# Altium PCB Earphone-6.PcbDoc
Units mil, origin at the board's own origin, x right, y up, seen from the top; angles counter-clockwise.
Board outline 966.28 x 1869.04 mil, 2 copper layers (Top Layer, Bottom Layer); 84 components, 41 nets, 259 pads, 67 vias.
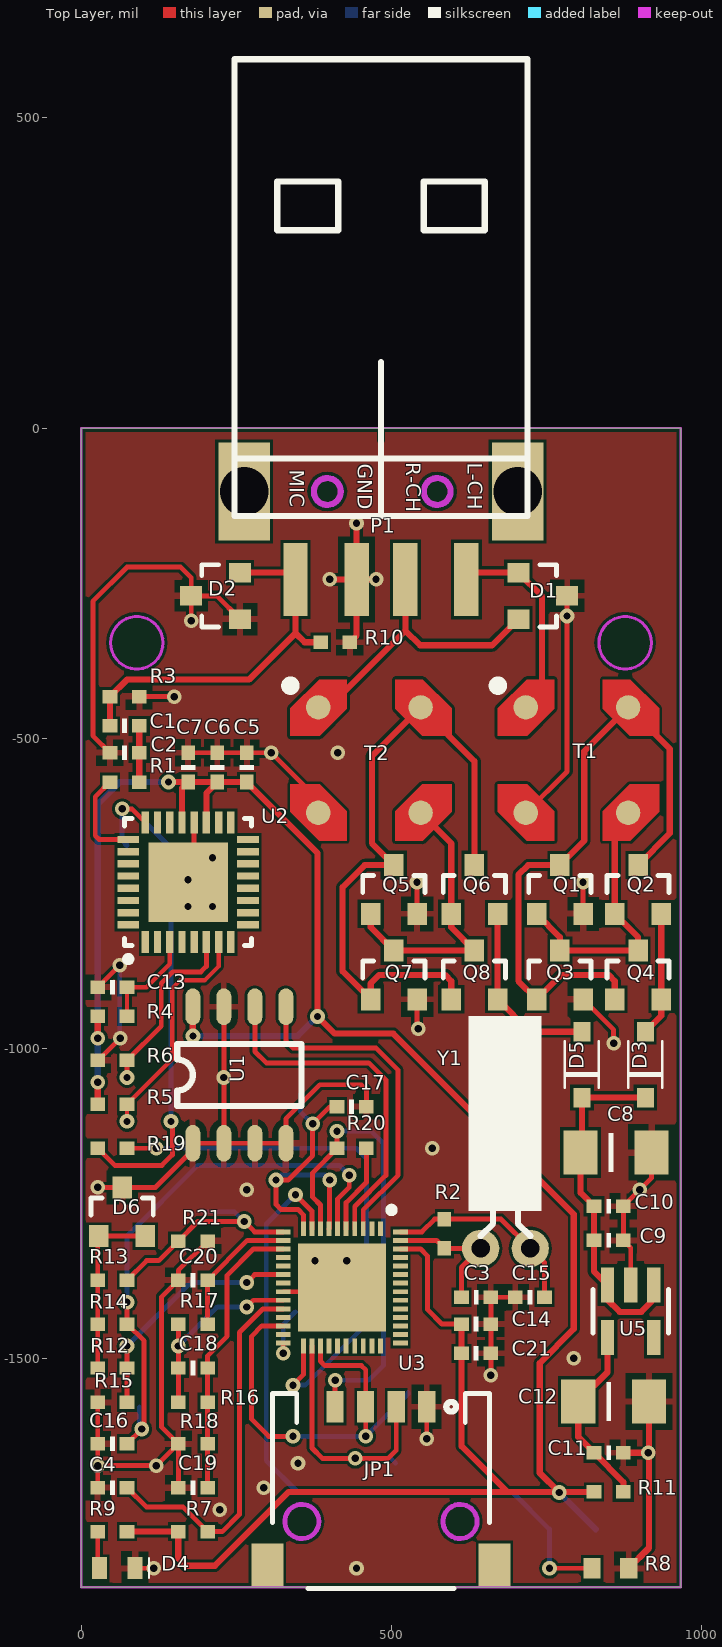
[diagram p0: Top Layer view]
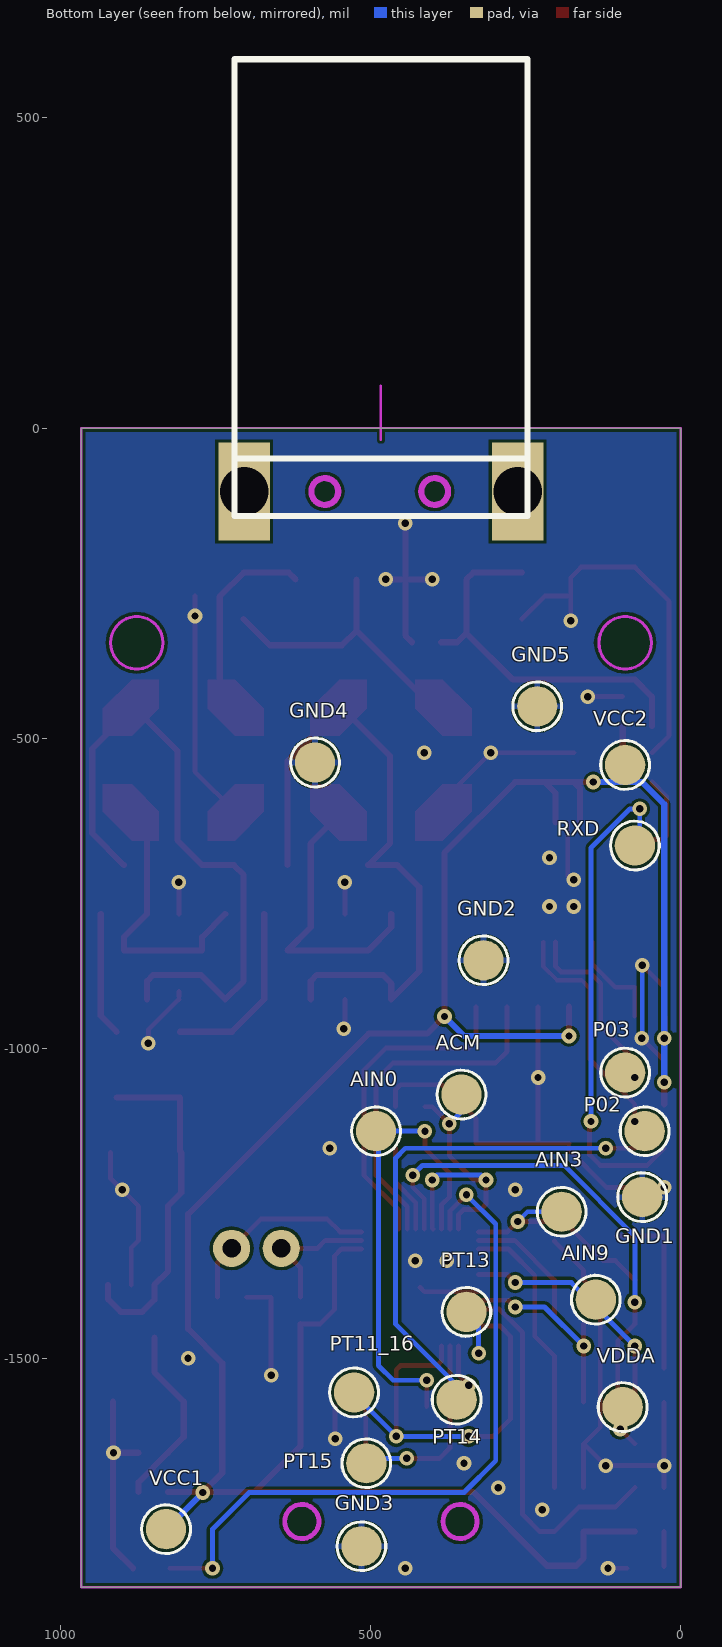
[diagram p1: Bottom Layer view, seen from below]
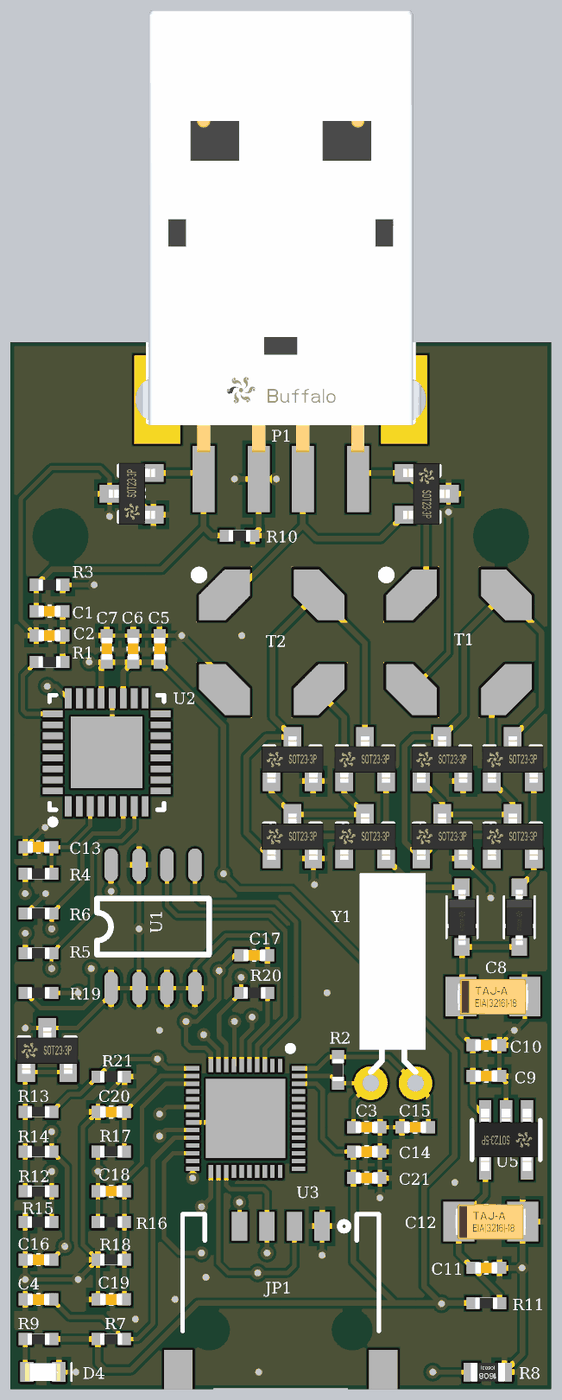
[diagram p2: 3D render of the assembled board from above, using the file's embedded part models]

## Layer stack, top to bottom
Top Solder: solder mask 0.4, Solder Resist, Dk 3.5
Top Layer: signal copper 1.4
Dielectric1: dielectric 12.6, FR-4, Dk 4.8
Bottom Layer: signal copper 1.4
Bottom Solder: solder mask 0.4, Solder Resist, Dk 3.5

## Board outline
0,-1869.04 0,0 966.28,0 966.28,-1869.04

## Design rules (kind name [scope] priority, off if disabled: settings)
Clearance [All] p1: gap=5
FabricationTestPointUsage TestPointUsage [All] p1: valid=0 allowmultiple=FALSE
FabricationTestpoint Testpoint [All] p1: side=3 testpointundercomponent=TRUE minsize=40 maxsize=100 preferedsize=60 minholesize=0 maxholesize=40 preferedholesize=32 testpointgrid=1 allowsidetop=TRUE allowsidebottom=TRUE usegrid=TRUE gridtolerance=0.01
HoleSize [All] p1: absolutevalues=TRUE maxlimit=100 minlimit=3.94 maxpercent=80.000 minpercent=20.000
HoleToHoleClearance [All] p1: gap=7.87 allowstackedmicrovias=TRUE
MinimumSolderMaskSliver [All] p1: minsoldermaskwidth=0
PolygonConnect PolygonConnect_1 [IsVia] p1: connectstyle=Direct reliefconductorwidth=10 reliefentries=4 polygonreliefangle="90 Angle" airgapwidth=10
PolygonConnect [All] p2: connectstyle=Relief reliefconductorwidth=10 reliefentries=4 polygonreliefangle="90 Angle" airgapwidth=10
RoutingVias [All] p1: holewidth=28 width=50 viastyle="Through Hole" minholewidth=3.94 minwidth=3.94 maxholewidth=28 maxwidth=50
SilkToSilkClearance [All] p1: silktosilkclearance=3.94
SilkToSolderMaskClearance SilkscreenOverComponentPads [IsPad] p1: minsilkscreentomaskgap=3.94 clearancetoexposedcopper=TRUE
SolderMaskExpansion [All] p1: expansion=4
Width [All] p1: maxlimit=10 minlimit=3.94 preferedwidth=10 minimp=50.000000 maximp=50.000000 favimp=50.000000
23 further rules are at their usual default settings.

## Components (designator, comment, footprint, x,y, rotation, side; value= is the part's Value field where it differs from the comment)
ACM "TP9" SIP1 353.22,-1074.8 r180 bottom
AIN0 "TP8" SIP1 491.01,-1133.86 r180 bottom
AIN3 "TP11" SIP1 191.8,-1263.78 r90 bottom
AIN9 "TP12" SIP1 136.68,-1405.51 r90 bottom
C1 "2.2uF" 0402C 69.76,-480.32 r0 top
C2 "47pF" 0402C 69.76,-523.62 r0 top
C3 "20pF" 0402C 636.68,-1401.57 r180 top
C4 "0.1uF" 0402C 50.07,-1708.66 r0 top
C5 "0.01uF" 0402C 266.6,-547.24 r270 top
C6 "0.01uF" 0402C 219.36,-547.24 r270 top
C7 "0.01uF" 0402C 172.11,-547.24 r270 top
C8 "CP6032-100uF" T3216-18[A] 862.21,-1168.25 r0 top
C9 "1uF" 0402C 850.39,-1309.98 r180 top
C10 "10uF" 0402C 850.39,-1254.87 r180 top
C11 "10uF" 0402C 850.39,-1652.5 r180 top
C12 "CP6032-100uF" T3216-18[A] 858.27,-1569.83 r0 top
C13 "1uF" 0402C 50.07,-901.57 r0 top
C14 "10uF" 0402C 636.68,-1444.88 r0 top
C15 "20pF" 0402C 723.3,-1401.57 r0 top
C16 "1uF" 0402C 50.07,-1637.8 r180 top
C17 "0.1uF" 0402C 435.89,-1094.49 r180 top
C18 "30pF" 0402C 179.99,-1515.75 r0 top
C19 "3.9nF" 0402C 179.99,-1708.66 r0 top
C20 "27nF" 0402C 179.99,-1374.02 r180 top
C21 "0.1uF" 0402C 636.68,-1492.13 r180 top
D1 "PESD5V2S2UT" SOT23 744.1,-270.61 r270 top
D2 "PESD5V2S2UT" SOT23 216.54,-270.61 r90 top
D3 "PMEG4002EJ" SOD323 909.45,-1026.52 r90 top
D4 "LED" 0603L 57.94,-1838.58 r0 top
D5 "PMEG4002EJ" SOD323 807.09,-1026.52 r90 top
D6 "AZ432" SOT23 65.82,-1263.78 r0 top
GND1 "TP3" SIP1 61.88,-1240.16 r180 bottom
GND2 "TP4" SIP1 317.78,-858.27 r180 bottom
GND3 "TP15" SIP1 514.63,-1803.15 r90 bottom
GND4 "TP16" SIP1 589.44,-539.37 r90 bottom
GND5 "TP17" SIP1 231.17,-448.82 r90 bottom
JP1 "TEST_PAPER" TEST_PAPER 483.14,-1706.17 r0 top
P1 "EarPhone" USB-A 483.14,-173.23 r270 top
P02 "TP18" SIP1 57.94,-1133.86 r180 bottom
P03 "TP19" SIP1 89.44,-1039.37 r180 bottom
PT11_16 "TP6" SIP1 526.45,-1555.12 r180 bottom
PT13 "TP13" SIP1 345.34,-1425.2 r90 bottom
PT14 "TP14" SIP1 361.09,-1566.93 r90 bottom
PT15 "TP7" SIP1 506.76,-1669.29 r180 bottom
Q1 "N-MOSFET" SOT23 771.65,-744.09 r0 top
Q2 "P-MOSFET" SOT23 897.64,-744.09 r0 top
Q3 "N-MOSFET" SOT23 771.65,-881.89 r0 top
Q4 "P-MOSFET" SOT23 897.64,-881.89 r0 top
Q5 "N-MOSFET" SOT23 503.94,-744.09 r0 top
Q6 "P-MOSFET" SOT23 633.86,-744.09 r0 top
Q7 "N-MOSFET" SOT23 503.94,-881.89 r0 top
Q8 "P-MOSFET" SOT23 633.86,-881.89 r0 top
R1 "1K" 0402R 69.75,-570.87 r0 top
R2 "10M" 0402R 585.5,-1299.21 r270 top
R3 "1K" 0402R 69.76,-433.07 r0 top
R4 "10K" 0402R 50.07,-948.82 r180 top
R5 "10K" 0402R 50.07,-1090.55 r0 top
R6 "10K" 0402R 50.07,-1019.68 r180 top
R7 "100K" 0402R 179.99,-1779.53 r180 top
R8 "NTC" 0603R 853.22,-1838.58 r180 top
R9 "10K" 0402R 50.07,-1779.53 r180 top
R10 "2.2K" 0402R 409.45,-345.42 r0 top
R11 "0R" 0402R 850.39,-1715.5 r180 top
R12 "560K/1%" 0402R 50.07,-1515.75 r180 top
R13 "210K/1%" 0402R 50.07,-1374.02 r180 top
R14 "2.2K" 0402R 50.07,-1444.88 r180 top
R15 "180K/1%" 0402R 50.07,-1570.87 r180 top
R16 "20K/100ppm" 0402R 179.99,-1570.87 r0 top
R17 "1K" 0402R 179.99,-1444.88 r180 top
R18 "560K" 0402R 179.99,-1637.8 r180 top
R19 "1K" 0402R 50.07,-1161.42 r0 top
R20 "200R" 0402R 435.89,-1161.42 r0 top
R21 "100K/1%" 0402R 179.99,-1311.02 r180 top
RXD "TP5" SIP1 73.69,-673.23 r180 bottom
T1 "LPR6235" "TRANS EMI" 799.21,-535.43 r0 top
T2 "LPR6235" "Trans EMI" 464.57,-535.43 r0 top
U1 "24C08" SOP-8 254.79,-1043.31 r90 top
U2 "LPC822M101JHI33" QFN50P500X500X100-33N 172.11,-732.28 r90 top
U3 "GLU_QFN48" QFN_48PIN 420.15,-1385.83 r270 top
U5 "MIC5231" SOT23-5 885.83,-1424.16 r180 top
VCC1 "TP1" SIP1 829.6,-1775.59 r180 bottom
VCC2 "TP2" SIP1 89.44,-543.31 r180 bottom
VDDA "TP10" SIP1 93.37,-1578.74 r90 bottom
Y1 "32.768KHz" Y1 683.93,-1322.83 r180 top

## Footprints (in the part's own frame and the unit in brackets; to place one, negate y for a bottom-side part, rotate by r counter-clockwise, add the part's x,y. Pads: shape width x height; smd on the part's side, far side on the other; paste and mask are expansions set on the pad)
0402C [mm]
  rect 0.6x0.55 smd: 1(-0.6,0) 2(0.6,0)
  silkscreen extent -0.1,-0.3 0.1,0.3, body extent -0.5,-0.25 0.5,0.25, height 0.5
0402R [mm]
  rect 0.6x0.55 smd: 1(-0.6,0) 2(0.6,0)
  body extent -0.5,-0.25 0.5,0.25, height 0.35
0603L [mm]
  rect 0.6x0.9 smd: 1(-0.725,0) 2(0.725,0)
  silkscreen extent 1.3,-0.4 1.3,0.4, body extent -0.8,-0.41 0.8,0.39, height 0.6
0603R [mm]
  rect 0.7x0.85 smd: 1(-0.75,0) 2(0.75,0)
  body extent -0.77,-0.43 0.77,0.43, height 0.46
QFN50P500X500X100-33N [mm]
  rect 0.9x0.3 smd: 1(-2.45,1.75) 2(-2.45,1.25) 3(-2.45,0.75) 4(-2.45,0.25) 5(-2.45,-0.25) 6(-2.45,-0.75) 7(-2.45,-1.25) 8(-2.45,-1.75) 17(2.45,-1.75) 18(2.45,-1.25) 19(2.45,-0.75) 20(2.45,-0.25) 21(2.45,0.25) 22(2.45,0.75) 23(2.45,1.25) 24(2.45,1.75)
  rect 0.3x0.9 smd: 9(-1.75,-2.45) 10(-1.25,-2.45) 11(-0.75,-2.45) 12(-0.25,-2.45) 13(0.25,-2.45) 14(0.75,-2.45) 15(1.25,-2.45) 16(1.75,-2.45) 25(1.75,2.45) 26(1.25,2.45) 27(0.75,2.45) 28(0.25,2.45) 29(-0.25,2.45) 30(-0.75,2.45) 31(-1.25,2.45) 32(-1.75,2.45)
  rect 3.25x3.25 smd: 33(0,0)
  silkscreen extent -3.27,-2.6 2.6,2.6
QFN_48PIN [mm]
  rect 3.6x3.6 smd: 0(0,0)
  rect 0.6x0.2 smd: 1(-2.4,1.575) 2(-2.4,1.225) 3(-2.4,0.875) 4(-2.4,0.525) 5(-2.4,0.175) 6(-2.4,-0.175) 7(-2.4,-0.525) 8(-2.4,-0.875) 9(-2.4,-1.225) 10(-2.4,-1.575) 25(2.4,-1.575) 26(2.4,-1.225) 27(2.4,-0.875) 28(2.4,-0.525) 29(2.4,-0.175) 30(2.4,0.175) 31(2.4,0.525) 32(2.4,0.875) 33(2.4,1.225) 34(2.4,1.575)
  rect 0.2x0.6 smd: 11(-2.275,-2.4) 12(-1.925,-2.4) 13(-1.575,-2.4) 14(-1.225,-2.4) 15(-0.875,-2.4) 16(-0.525,-2.4) 17(-0.175,-2.4) 18(0.175,-2.4) 19(0.525,-2.4) 20(0.875,-2.4) 21(1.225,-2.4) 22(1.575,-2.4) 23(1.925,-2.4) 24(2.275,-2.4) 35(2.275,2.4) 36(1.925,2.4) 37(1.575,2.4) 38(1.225,2.4) 39(0.875,2.4) 40(0.525,2.4) 41(0.175,2.4) 42(-0.175,2.4) 43(-0.525,2.4) 44(-0.875,2.4) 45(-1.225,2.4) 46(-1.575,2.4) 47(-1.925,2.4) 48(-2.275,2.4)
  silkscreen extent -3.3,1.91 -3.05,2.16
SIP1 [mm]
  round 1.65 smd: 1(0,0)
  silkscreen extent -1,-1 1,1
SOD323 [mm]
  rect 0.8x0.7 smd: 1(-1.35,0) 2(1.35,0)
  silkscreen extent -0.95,-0.7 0.95,0.7, body extent -1.26,-0.63 1.24,0.63, height 1.1
SOP-8 [mil]
  oval 59.06x24 smd: 1(-110,75) 2(-110,25) 3(-110,-25) 4(-110,-75) 5(110,-75) 6(110,-25) 7(110,25) 8(110,75)
  silkscreen extent -50,-100 50,100
SOT23 [mm]
  rect 0.8x0.9 smd: 1(-0.95,-1) 2(0.95,-1) 3(0,1)
  silkscreen extent -1.28,-0.13 1.28,0.57, body extent -1.4,-1.07 1.4,1.03, height 0.9
SOT23-5 [mm]
  rect 0.55x1.45 smd: 1(-0.95,-1.075) 2(0,-1.075) 3(0.95,-1.075) 4(0.95,1.075) 5(-0.95,1.075)
  silkscreen extent -1.55,-0.9 1.55,0.9, body extent -1.45,-1.42 1.45,1.4, height 1.1
T3216-18[A] [mm]
  rect 1.4x1.8 smd: 1(-1.45,0) 2(1.45,0)
  silkscreen extent -0.3,-0.8 -0.1,0.8, body extent -1.6,-0.81 1.6,0.79, height 1.62
TEST_PAPER [mm]
  rect 1.3x1.8 smd: 0(-4.65,-3.25) 0(4.65,-3.25)
  rect 0.7x1.3 smd: 1(1.875,3.25) 2(0.625,3.25) 3(-0.625,3.25) 4(-1.875,3.25)
  Keep-Out Layer circle w0.2: c-3.24,-1.45 r0.7
  Keep-Out Layer circle w0.2: c3.24,-1.45 r0.7
  silkscreen extent -4.45,-4.2 4.45,3.8
"TRANS EMI" [mil]
  round 39.37 smd: 1(-82.5,85) 2(-82.5,-85) 3(82.5,-85) 4(82.5,85)
  Top Layer region: 41.87,82.68 85.18,39.37 132.42,39.37 132.42,83.66 86.16,129.92 41.87,129.92
  Top Layer region: 41.87,-129.92 41.87,-82.68 85.18,-39.37 132.42,-39.37 132.42,-83.66 86.16,-129.92
  Top Layer region: -127.42,-83.66 -81.16,-129.92 -36.87,-129.92 -36.87,-82.68 -80.18,-39.37 -127.42,-39.37
  Top Layer region: -127.42,39.37 -127.42,83.66 -81.16,129.92 -36.87,129.92 -36.87,82.68 -80.18,39.37
  silkscreen extent -132,115 -122,125
"Trans EMI" [mil]
  round 39.37 smd: 1(-82.5,85) 2(-82.5,-85) 3(82.5,-85) 4(82.5,85)
  Top Layer region: 41.87,82.68 85.18,39.37 132.42,39.37 132.42,83.66 86.16,129.92 41.87,129.92
  Top Layer region: 41.87,-129.92 41.87,-82.68 85.18,-39.37 132.42,-39.37 132.42,-83.66 86.16,-129.92
  Top Layer region: -127.42,-83.66 -81.16,-129.92 -36.87,-129.92 -36.87,-82.68 -80.18,-39.37 -127.42,-39.37
  Top Layer region: -127.42,39.37 -127.42,83.66 -81.16,129.92 -36.87,129.92 -36.87,82.68 -80.18,39.37
  silkscreen extent -132,115 -122,125
USB-A [mm]
  rect 3x1 smd: 1(1.8,3.5) 2(1.8,1) 3(1.8,-1) 4(1.8,-3.5)
  rect 4x2.1 hole 2: 5(-1.8,5.6) 6(-1.8,-5.6)
  Keep-Out Layer circle w0.254: c-1.8,-2.2 r0.55
  Keep-Out Layer circle w0.254: c-1.8,2.3 r0.55
  silkscreen extent -19.5,-6 -0.8,6, body extent -19.43,-6.35 0.59,6.35, height 3.1
Y1 [mil]
  round 60 hole 30: 1(-40,0) 2(40,0)
  silkscreen extent -58,-375 60,-20

## Part data
ACM AIN0 AIN3 AIN9 GND1 GND2 GND3 GND4 GND5 P02 P03 PT11_16 PT13 PT14 PT15 RXD VCC1 VCC2 VDDA: library part TEST_PAD
C1 C2 C3 C4 C5 C6 C7 C9 C10 C11 C13 C15 C17 C18 C19 C20 C21: library part CAP
C8 C12 C14 C16: library part "CAP POL2"
D1 D2: "SOT23"
D3 D5: "SOD323F"
Q1 Q3 Q5 Q7: "4N80 N-Channel MOSFET"
Q2 Q4 Q6 Q8: "P-Channel MOSFET"
R1 R2 R3 R4 R5 R6 R7 R8 R9 R10 R11 R12 R13 R14 R15 R16 R17 R18 R19 R20 R21: library part RES
T1 T2: library part "Trans EMI"

## Via types
v1: diameter 23.62, hole 11.81, Top Layer to Bottom Layer, tented both sides, 67 vias

## Nets (pads, with @x,y where several pads share a name; then routed paths per layer and width w, separated by ;. In a path a pad name is that pad's centre, name@x,y a point inside that pad or via, vN(x,y) a via of type N, cw(c..) or ccw(c..) an arc to the next point about the centre after c; other vN are vias at no path point)
ACM: ACM.1 C17.2 U3.7 U3.10 | length 518.2
  Top Layer w7.87: U3.10 358.14,-1268.7 349.28,-1259.84 321.72,-1259.84 313.85,-1251.97 v1(313.85,-1212.6) 333.53,-1212.6 372.9,-1173.23 v1(372.9,-1122.05) 400.46,-1094.49 C17.2 ; U3.7 400.38,-1290.43 400.38,-1212.68 v1(400.46,-1212.6)
  Bottom Layer w7.87: v1(313.85,-1212.6) 321.72,-1204.72 392.59,-1204.72 v1(400.46,-1212.6) ; ACM.1 353.22,-1102.36 v1(372.9,-1122.05)
AIN0: AIN0.1 JP1.4 R20.1 U3.8 | length 750.6
  Top Layer w7.87: U3.8 385.7,-1252.95 372.9,-1240.16 372.9,-1200.79 R20.1 v1(412.27,-1133.86) ; JP1.4 v1(409.32,-1535.43)
  Bottom Layer w7.87: v1(409.32,-1535.43) 463.45,-1535.43 487.08,-1511.81 487.08,-1153.54 467.39,-1133.86 v1(412.27,-1133.86)
AIN3: AIN3.1 R13.1 R21.2 U3.11 | length 371.5
  Top Layer w7.87: R13.1 105.19,-1342.52 124.87,-1342.52 R21.2 187.86,-1279.53 v1(262.67,-1279.53) 279.4,-1296.26 U3.11
  Bottom Layer w7.09: AIN3.1@195.74,-1263.78 246.92,-1263.78 v1(262.67,-1279.53)
AIN4: C20.1 R17.1 U3.12 | length 207.6
  Top Layer w7.87: 203.61,-1433.07 C20.1 267.59,-1310.04 U3.12
AIN5: C18.2 C19.2 R16.2 R18.1 U3.13 | length 463.6
  Top Layer w7.87: C19.2 R18.1 203.61,-1496.06 235.11,-1464.57 235.11,-1366.14 277.43,-1323.82 U3.13
AIN9: AIN9.1 R12.1 R15.1 U3.16 | length 390.2
  Top Layer w7.87: R15.1 v1(73.69,-1480.32) ; v1(266.6,-1377.95) 279.4,-1365.16 U3.16
  Bottom Layer w7.87: v1(73.69,-1480.32) 176.05,-1377.95 v1(266.6,-1377.95)
E_VCC: R20.2 U3.5 | length 143.4
  Top Layer w7.87: U3.5 427.04,-1249.02 459.52,-1216.54 R20.2
GND: C2.1 C3.1 C4.1 C5.1 C6.1 C7.1 C8.2 C9.1 C10.1 C11.1 C12.2 C13.1 C14.2 C15.1 C16.2 C17.1 C19.1 C20.2 C21.1 D1.3 D2.1 D2.3 D4.2 D6.3 GND1.1 GND2.1 GND3.1 GND4.1 GND5.1 JP1.1 P1.3 Q1.2 Q3.2 Q5.2 Q7.2 R3.2 R6.2 R8.1 R10.2 R15.2 R18.2 R21.1 T1.2 T2.2 U1.1 U1.2 U1.3 U1.4 U1.7 U2.20 U2.33 U3.0 U3.18 U5.2 | length 4543
  Top Layer w7.87: C4.1 v1(26.45,-1673.23) ; R15.2 C16.2 v1(26.45,-1673.23) ; v1(26.45,-1224.41) D6.3 119.63,-1224.41 179.79,-1164.25 U1.1@179.79,-1159.33 ; R6.2 27.43,-1019.68 v1(62.86,-984.25) ; C13.1 v1(61.88,-866.14) ; C2.1 18.57,-496.05 18.57,-279.53 73.69,-224.41 160.3,-224.41 177.17,-241.27 D2.3 ; D4.2 v1(117,-1838.58) ; R3.2 v1(149.61,-433.07) ; C19.1 R18.2 ; U2.33 181.96,-722.44 U2.20 ; C7.1 C6.1 C5.1 v1(305.98,-523.62) 382.07,-599.71 T2.2 ; v1(177.15,-311.02) D2.3 ; U1.1 U1.2 ; R21.1 156.37,-1358.27 C20.2 129.56,-1400.83 129.56,-1610.98 R18.2 ; U1.7 U1.2 ; D2.1 218.5,-270.61 D2.3 ; U3.18 413.26,-1392.72 U3.0 ; C17.1 459.52,-1066.93 451.64,-1059.06 384.71,-1059.06 329.79,-1113.98 U1.4 U1.2 ; v1@541.34,-966.54 Q7.2 ; Q5.2 v1(541.33,-732.28) ; v1(556.96,-1629.92) JP1.1 ; v1(660.3,-1527.56) C21.1 C14.2 C3.1 C15.1 ; T1.2 783.1,-554.05 v1(783.1,-303.15) 783.1,-270.98 D1.3 ; Q3.2 858.27,-970.47 v1(858.27,-992.13) ; Q3.2@809.06,-916.47 Q3.2@809.06,-908.41 ; Q1.2 v1@809.06,-732.3 ; U5.2 885.83,-1321.8 C9.1 C10.1 919.29,-1209.59 C8.2 ; v1(26.45,-1673.23) v1(120.93,-1673.23) R18.2
  Top Layer w10: v1(400.46,-244.09) P1.3 ; R10.2 443.77,-334.72 P1.3 ; v1(443.77,-153.54) P1.3 ; v1(475.26,-244.09) P1.3 ; C11.1 v1(914.32,-1652.5) ; R8.1 915.35,-1805.97 C12.2
  Bottom Layer w7.87: v1@61.88,-983.27 v1(61.88,-866.14)
  other v1: 443.77,-1838.58 223.3,-1744.09 294.16,-1708.66 349.28,-1669.29 794.16,-1500 376.84,-1342.52 428.02,-1342.52 266.6,-1228.35 900.54,-1228.35 565.82,-1161.42 229.79,-1047.24 543.31,-968.5 172.11,-771.65 211.48,-771.65 809.04,-732.28 172.11,-728.35 211.48,-692.91 413.39,-523.62
L-CH: D1.1 P1.1 T1.1 | length 332.2
  Top Layer w10: P1.1 631.82,-233.21 D1.1 742.98,-271.47 742.98,-424.16 T1.1
MIC: C1.1 D2.2 P1.4 R3.1 R10.1 | length 616
  Top Layer w10: C1.1 R3.1 73.7,-405.51 270.54,-405.51 345.34,-330.71 ; D2.2 334.46,-233.21 P1.4 345.34,-330.71 ; R10.1 360.05,-345.42 345.34,-330.71
NetC1_2: C1.2 C2.2 R1.2 | length 90.5
  Top Layer w10: R1.2 C1.2
NetC11_2: C11.2 C12.1 R11.1 U5.4 | length 298.8
  Top Layer w10: U5.4 848.43,-1522.58 C12.1 801.18,-1626.91 C11.2 874.02,-1699.75 R11.1
NetD3_2: D3.2 Q2.2 Q4.2 | length 200.5
  Top Layer w10: D3.2 935.04,-947.78 Q4.2 Q2.2
NetD4_1: D4.1 R9.2 | length 56.1
  Top Layer w7.87: D4.1@26.45,-1835.63 R9.2
NetD5_2: D5.2 Q6.2 Q8.2 | length 295.2
  Top Layer w10: Q6.2 Q8.2 723.37,-973.37 D5.2
NetD6_1: D6.1 D6.2 R12.2 R13.2 R14.2 | length 288.2
  Top Layer w7.87: R12.2 R14.2 R13.2 26.45,-1305.12 D6.1 D6.2
NetQ1_1: Q1.1 Q2.1 Q3.3 Q4.3 T1.3 | length 447
  Top Layer w10: Q1.1 771.65,-820.87 Q3.3 Q4.3 897.64,-820.87 Q2.1 860.24,-641.91 T1.3
NetQ1_3: Q1.3 Q2.3 Q3.1 Q4.1 T1.4 | length 1065.5
  Top Layer w10: Q4.1 860.24,-891.73 850.39,-881.89 773.62,-881.89 Q3.1 704.72,-891.73 704.72,-720.47 720.47,-704.72 Q1.3 811.02,-665.35 811.02,-521.12 T1.4 948.82,-517.54 948.82,-653.54 Q2.3
NetQ5_1: Q5.1 Q6.1 Q7.3 Q8.3 T2.3 | length 462.5
  Top Layer w10: Q5.1 466.54,-805.12 Q7.3 Q8.3 596.46,-805.12 Q6.1 596.46,-669.82 T2.3
NetQ5_3: Q5.3 Q6.3 Q7.1 Q8.1 T2.4 | length 1083.8
  Top Layer w10: Q8.1 596.46,-891.73 586.61,-881.89 480.32,-881.89 466.54,-895.67 Q7.1 421.26,-875.98 421.26,-740.16 456.69,-704.72 Q5.3 468.5,-669.29 468.5,-529 T2.4 633.86,-537.22 Q6.3
NTC: R8.2 U3.9 | length 1149.1
  Top Layer w7.87: v1(345.34,-1236.22) 371.92,-1262.8 U3.9 ; v1(754.79,-1838.58) R8.2
  Bottom Layer w7.87: v1(345.34,-1236.22) 298.1,-1283.46 298.1,-1665.35 349.28,-1716.54 695.74,-1716.54 754.79,-1775.59 v1(754.79,-1838.58)
OPO: C18.1 R16.1 R17.2 U3.19 | length 325.9
  Top Layer w7.87: R16.1 C18.1 R17.2 ; v1(266.6,-1417.32) 277.43,-1406.49 U3.19
  Bottom Layer w7.87: v1(156.37,-1480.32) 219.36,-1417.32 v1(266.6,-1417.32)
P02: P02.1 R5.2 U2.7 | length 373.6
  Top Layer w7.09: v1(73.69,-1118.11) R5.2 146.29,-1017.95 146.29,-903.78 159.83,-890.24 199.2,-890.24 221.33,-868.11 U2.7
P03: P03.1 R6.1 U2.6 | length 298.1
  Top Layer w7.87: v1(73.69,-1047.24) R6.1 128.81,-964.57 128.81,-895.6 147.47,-876.94 192.82,-876.94 201.64,-868.11 U2.6
P05: C13.2 R4.1 U2.3 | length 167.1
  Top Layer w7.09: R4.1 C13.2 105.19,-901.57 142.59,-864.17 U2.3
P14: R1.1 U2.25 | length 152
  Top Layer w7.87: R1.1 22.51,-594.49 22.51,-657.48 28.41,-663.39 U2.25
PT10: U3.21
PT11_16: JP1.3 PT11_16.1 U3.22 U3.27 | length 696.9
  Top Layer w7.87: U3.22 291.21,-1447.83 274.48,-1464.57 274.48,-1598.43 302.04,-1625.98 v1(341.41,-1625.98) ; U3.27 385.7,-1504.92 392.59,-1511.81 451.64,-1511.81 458.53,-1518.7 JP1.3 v1(458.53,-1625.98)
  Bottom Layer w7.87: v1(341.41,-1625.98) v1(458.53,-1625.98) 526.45,-1558.07 PT11_16.1
PT13: PT13.1 U3.24 | length 87.7
  Top Layer w7.87: v1(325.66,-1492.13) 325.66,-1479.49
  Bottom Layer w7.87: v1(325.66,-1492.13) 325.66,-1444.88 PT13.1
PT14: PT14.1 R19.2 U3.25 | length 888.9
  Top Layer w7.87: R19.2 v1(120.93,-1161.42) ; v1(341.41,-1543.31) 358.14,-1526.58 U3.25
  Bottom Layer w7.87: v1(120.93,-1161.42) 443.77,-1161.42 459.52,-1177.17 459.52,-1444.88 361.09,-1543.31 v1(341.41,-1543.31)
PT15: JP1.2 PT15.1 U3.26 | length 451.1
  Top Layer w7.87: U3.26 371.92,-1644.69 388.65,-1661.42 v1(441.8,-1661.42) 494.95,-1661.42 507.74,-1648.62 JP1.2
  Bottom Layer w7.87: v1(441.8,-1661.42) 498.89,-1661.42 PT15.1
R-CH: D1.2 P1.2 T2.1 | length 483.9
  Top Layer w10: T2.1 398.85,-450.43 522.51,-326.77 ; P1.2 522.51,-326.77 ; D1.2 662.35,-350.39 546.13,-350.39 522.51,-326.77
RXD: R19.1 RXD.1 U2.24 | length 847.8
  Top Layer w7.87: R19.1 54,-1188.98 129.79,-1188.98 146.68,-1172.08 146.68,-1120.24 v1(144.56,-1118.11) ; v1(65.82,-614.17) 81.41,-614.17 U2.24@103.06,-635.83
  Bottom Layer w7.87: RXD.1 65.82,-665.35 v1(65.82,-614.17) 81.56,-614.17 144.56,-677.17 v1(144.56,-1118.11)
SCL: U1.6 U3.4 | length 563.2
  Top Layer w7.87: U1.6 279.79,-1005.31 298.1,-1023.62 463.45,-1023.62 491.01,-1051.18 491.01,-1205.06 440.82,-1255.25 U3.4
SDA: U1.5 U3.3 | length 534.6
  Top Layer w7.87: U1.5 329.79,-988.39 341.41,-1000 475.26,-1000 510.7,-1035.43 510.7,-1204.72 454.6,-1260.83 U3.3
VCC: C5.2 C6.2 C7.2 C14.1 C21.2 R4.2 R5.1 R7.2 R9.1 R11.2 U1.8 U2.19 U2.21 U3.46 VCC1.1 VCC2.1 | length 4065.1
  Top Layer w7.87: U3.46 547.11,-1323.82 557.94,-1334.65 557.94,-1421.26 581.56,-1444.88 C14.1
  Top Layer w10: R5.1 v1(26.45,-1055.12) ; v1(26.45,-984.25) R4.2 ; R9.1 R7.2 156.37,-1822.83 168.18,-1834.65 215.42,-1834.65 334.57,-1715.5 686.82,-1715.5 ; v1(140.62,-570.87) C7.2 ; U2.21 162.27,-580.71 C7.2 ; v1@179.79,-980.12 U1.8 ; U2.19 201.64,-588.58 C6.2 ; C14.1 C21.2 613.06,-1641.73 686.82,-1715.5 ; R11.2 v1@769.5,-1715.5 ; C7.2 C6.2 ; C6.2 C5.2 380.78,-685.04 v1(380.78,-948.82) 408.34,-976.38 502.82,-976.38 794.16,-1267.72 794.16,-1452.76 739.04,-1507.87 739.04,-1685.04 v1@769.5,-1715.5 ; 686.82,-1715.5 v1@769.5,-1715.5
  Bottom Layer w10: v1(26.45,-1055.12) v1(26.45,-984.25) 26.45,-606.3 61.88,-570.87 v1(140.62,-570.87) ; v1(179.99,-980.32) 349.28,-980.32 v1(380.78,-948.82) ; v1(770.54,-1716.54) VCC1.1
VCCIN: C8.1 C9.2 C10.2 D3.1 D5.1 U5.1 U5.3 | length 559
  Top Layer w10: C8.1 805.12,-1233.21 C10.2 C9.2 826.77,-1360.18 U5.3 848.43,-1405.9 867.91,-1425.38 902.87,-1425.38 923.23,-1405.02 U5.1 ; C8.1@807.09,-1166.28 D5.1 D3.1
VDDA: C16.1 R14.1 U3.6 VDDA.1 | length 901.2
  Top Layer w7.87: C16.1 v1(97.31,-1614.17) 101.25,-1610.24 101.25,-1472.02 74.11,-1444.88 R14.1 v1(73.69,-1409.45) ; U3.6 413.26,-1243.11 431.96,-1224.41 v1(431.96,-1204.72)
  Bottom Layer w7.87: v1(73.69,-1409.45) 73.69,-1303.15 187.86,-1188.98 416.21,-1188.98 v1(431.96,-1204.72) ; VDDA.1 93.37,-1610.24 v1(97.31,-1614.17)
VPP: C4.2 R7.1 U3.20 | length 602.1
  Top Layer w7.87: C4.2 105.19,-1740.16 164.24,-1740.16 R7.1 227.23,-1779.53 254.79,-1751.97 254.79,-1458.48 292.99,-1420.27 U3.20
XTI: C15.2 R2.1 U3.48 Y1.1 | length 325.7
  Top Layer w7.87: U3.48 549.08,-1296.26 569.75,-1275.59 R2.1 676.68,-1275.59 Y1.1 746.92,-1345.83 C15.2
XTO: C3.2 R2.2 U3.47 Y1.2 | length 226.1
  Top Layer w7.87: U3.47 572.7,-1310.04 R2.2 Y1.2 613.06,-1353.7 C3.2
pads on no net: JP1.0 P1.5 P1.6 U2.1 U2.2 U2.4 U2.5 U2.8 U2.9 U2.10 U2.11 U2.12 U2.13 U2.14 U2.15 U2.16 U2.17 U2.18 U2.22 U2.23 U2.26 U2.27 U2.28 U2.29 U2.30 U2.31 U2.32 U3.1 U3.2 U3.14 U3.15 U3.17 U3.23 U3.28 U3.29 U3.30 U3.31 U3.32 U3.33 U3.34 U3.35 U3.36 U3.37 U3.38 U3.39 U3.40 U3.41 U3.42 U3.43 U3.44 U3.45 U5.5

## Polygon pours and split planes (outlines as drawn)
GND on Top Layer "Top Layer-No Net" (solid, remove dead copper, pour order 18): 0,0 966.28,0 966.28,-1869.04 0,-1869.04
GND on Bottom Layer "Top Layer-No Net" (solid, remove dead copper, pour order 20): 0,0 966.28,0 966.28,-1869.04 0,-1869.04

## Keep-outs
Keep-Out Layer:
  circle w5: c89.45,-346.34 r42.32
  circle w5: c876.85,-346.34 r42.32
  lines w3.94: 483.14,-18.65 483.14,67.97 ; 0,-1869.04 966.28,-1869.04 966.28,0 0,0 0,-1869.04

## Text inside footprints (layer, text, board x,y; h text height)
C8: Mechanical 15 "-" at 897.21,-1183.25 h40; Mechanical 15 "+" at 807.21,-1188.25 h40
C12: Mechanical 15 "-" at 893.27,-1584.83 h40; Mechanical 15 "+" at 803.27,-1589.83 h40
P1: Top Overlay "GND" at 438,-58 h40 r270; Top Overlay "R-CH" at 516,-55 h40 r270; Top Overlay "MIC" at 327.63,-66.97 h40 r270; Top Overlay "L-CH" at 615,-56 h40 r270
U2: Mechanical 15 "1" at 189.83,-738.75 h40 r90